# Altium PCB Panel_robottino.PcbDoc
Units mm, origin at the board's own origin, x right, y up, seen from the top; angles counter-clockwise.
Board outline 48.25 x 45.25 mm, 4 copper layers (Top Layer, Internal Plane 1, Internal Plane 2, Bottom Layer); 60 components, 0 nets, 208 pads, 5 vias.
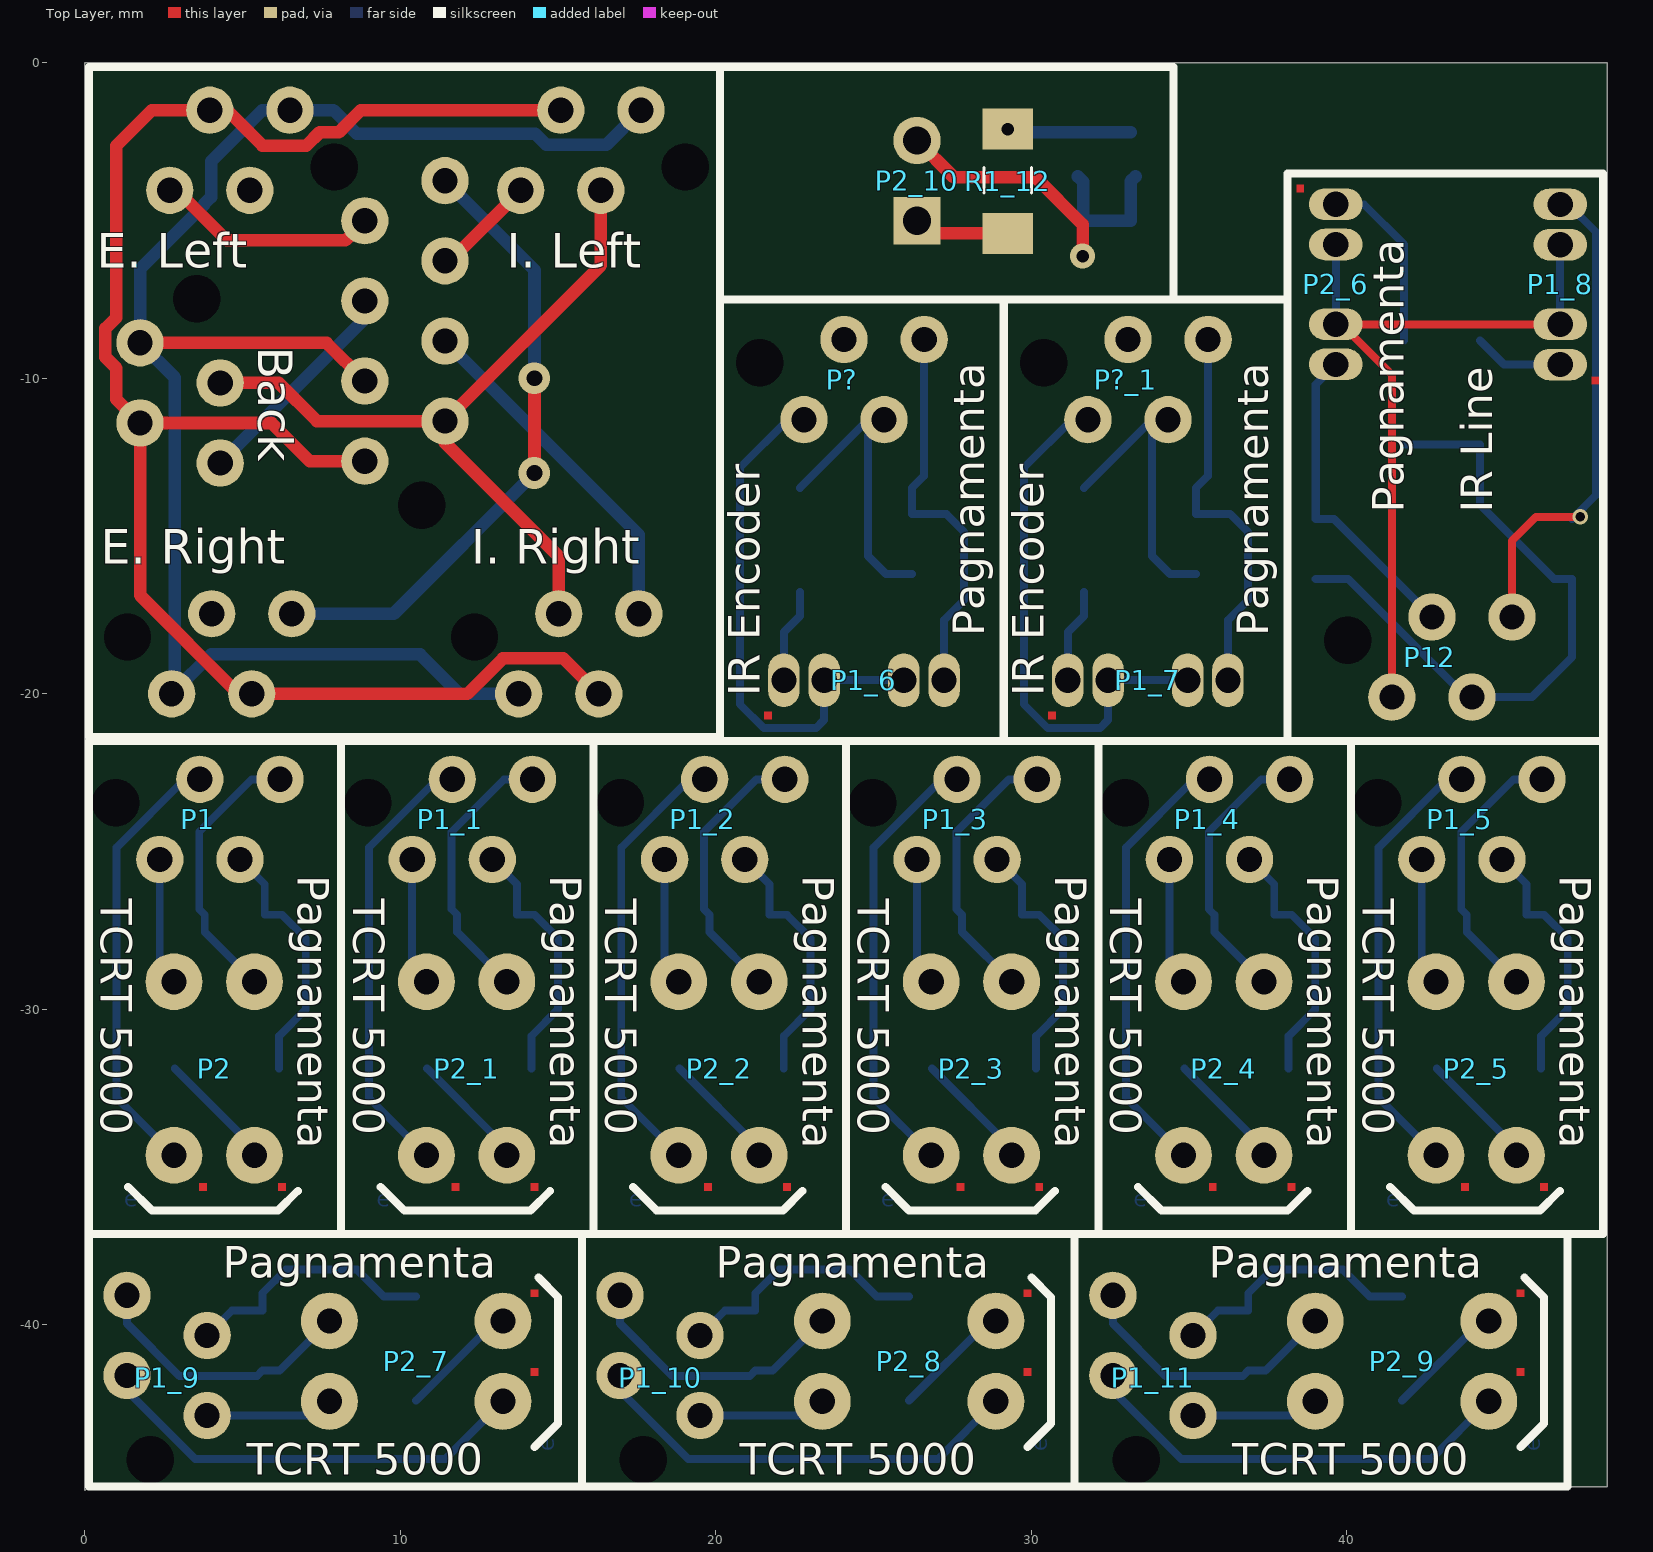
[diagram p0: Top Layer view]
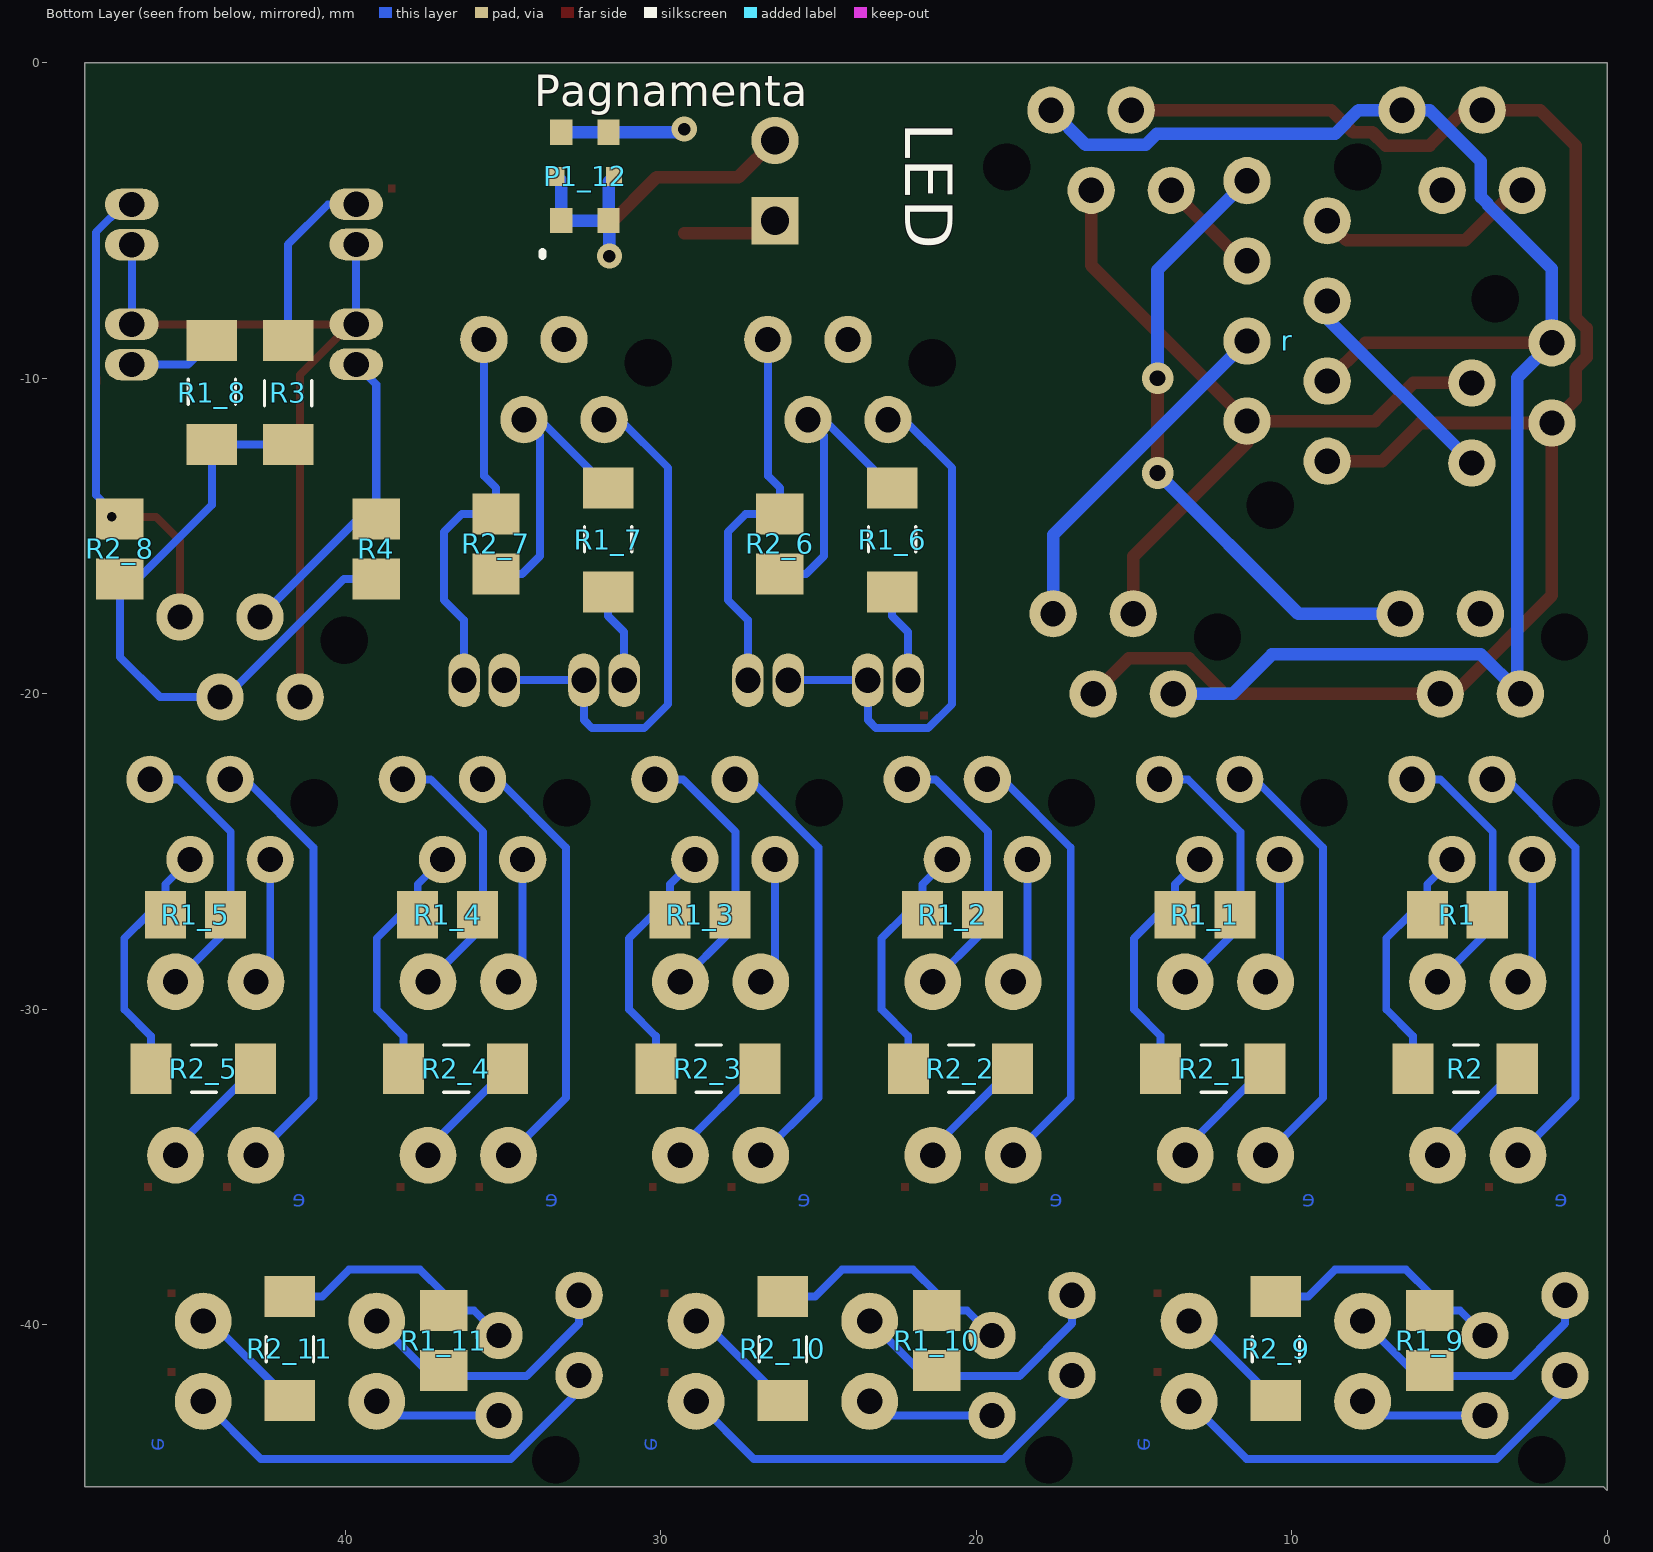
[diagram p1: Bottom Layer view, seen from below]
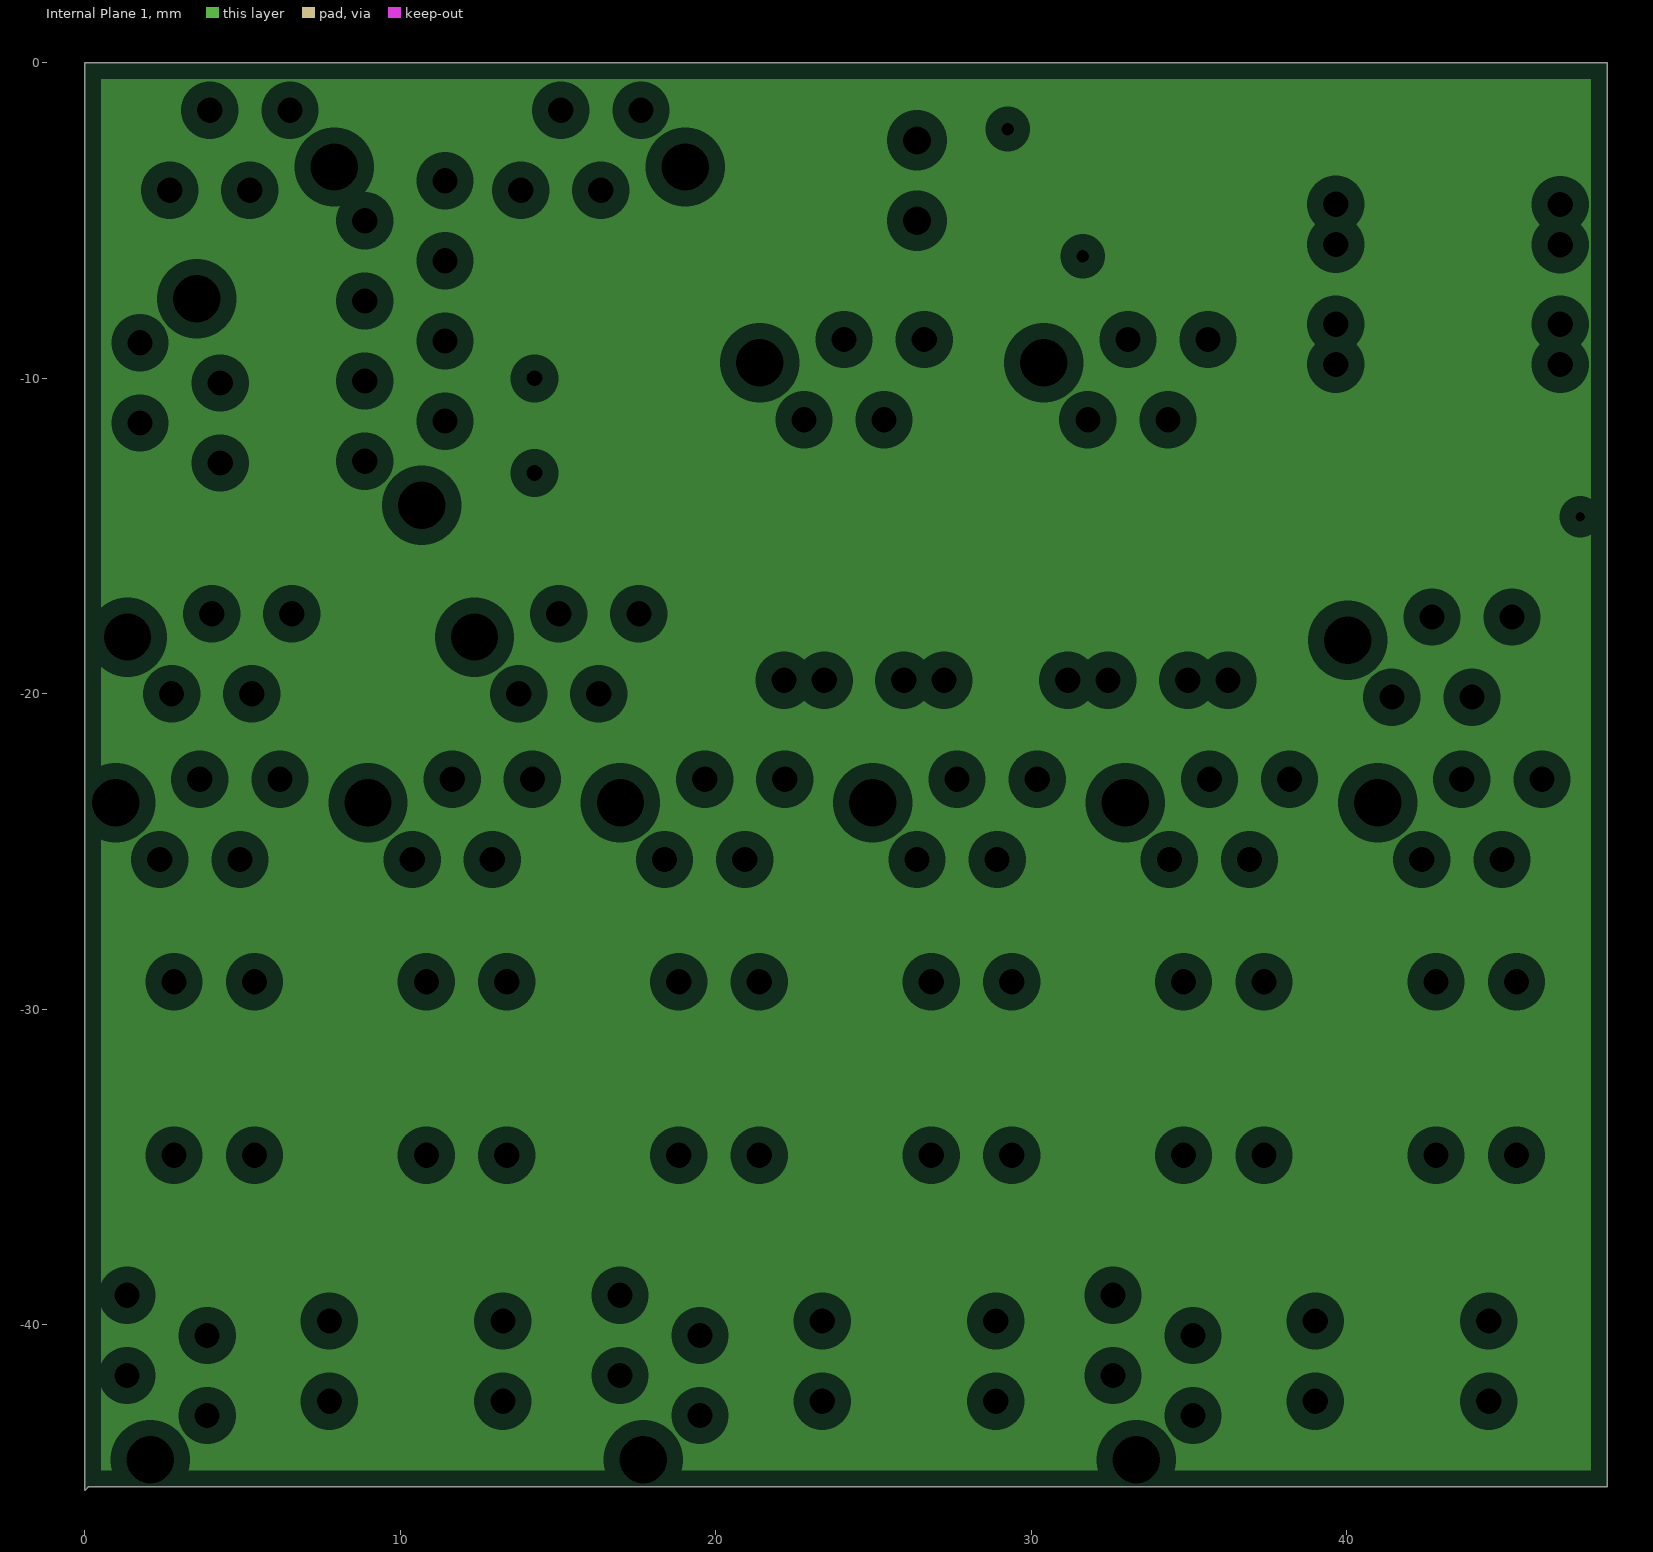
[diagram p2: Internal Plane 1, clearances drawn from the general rule]
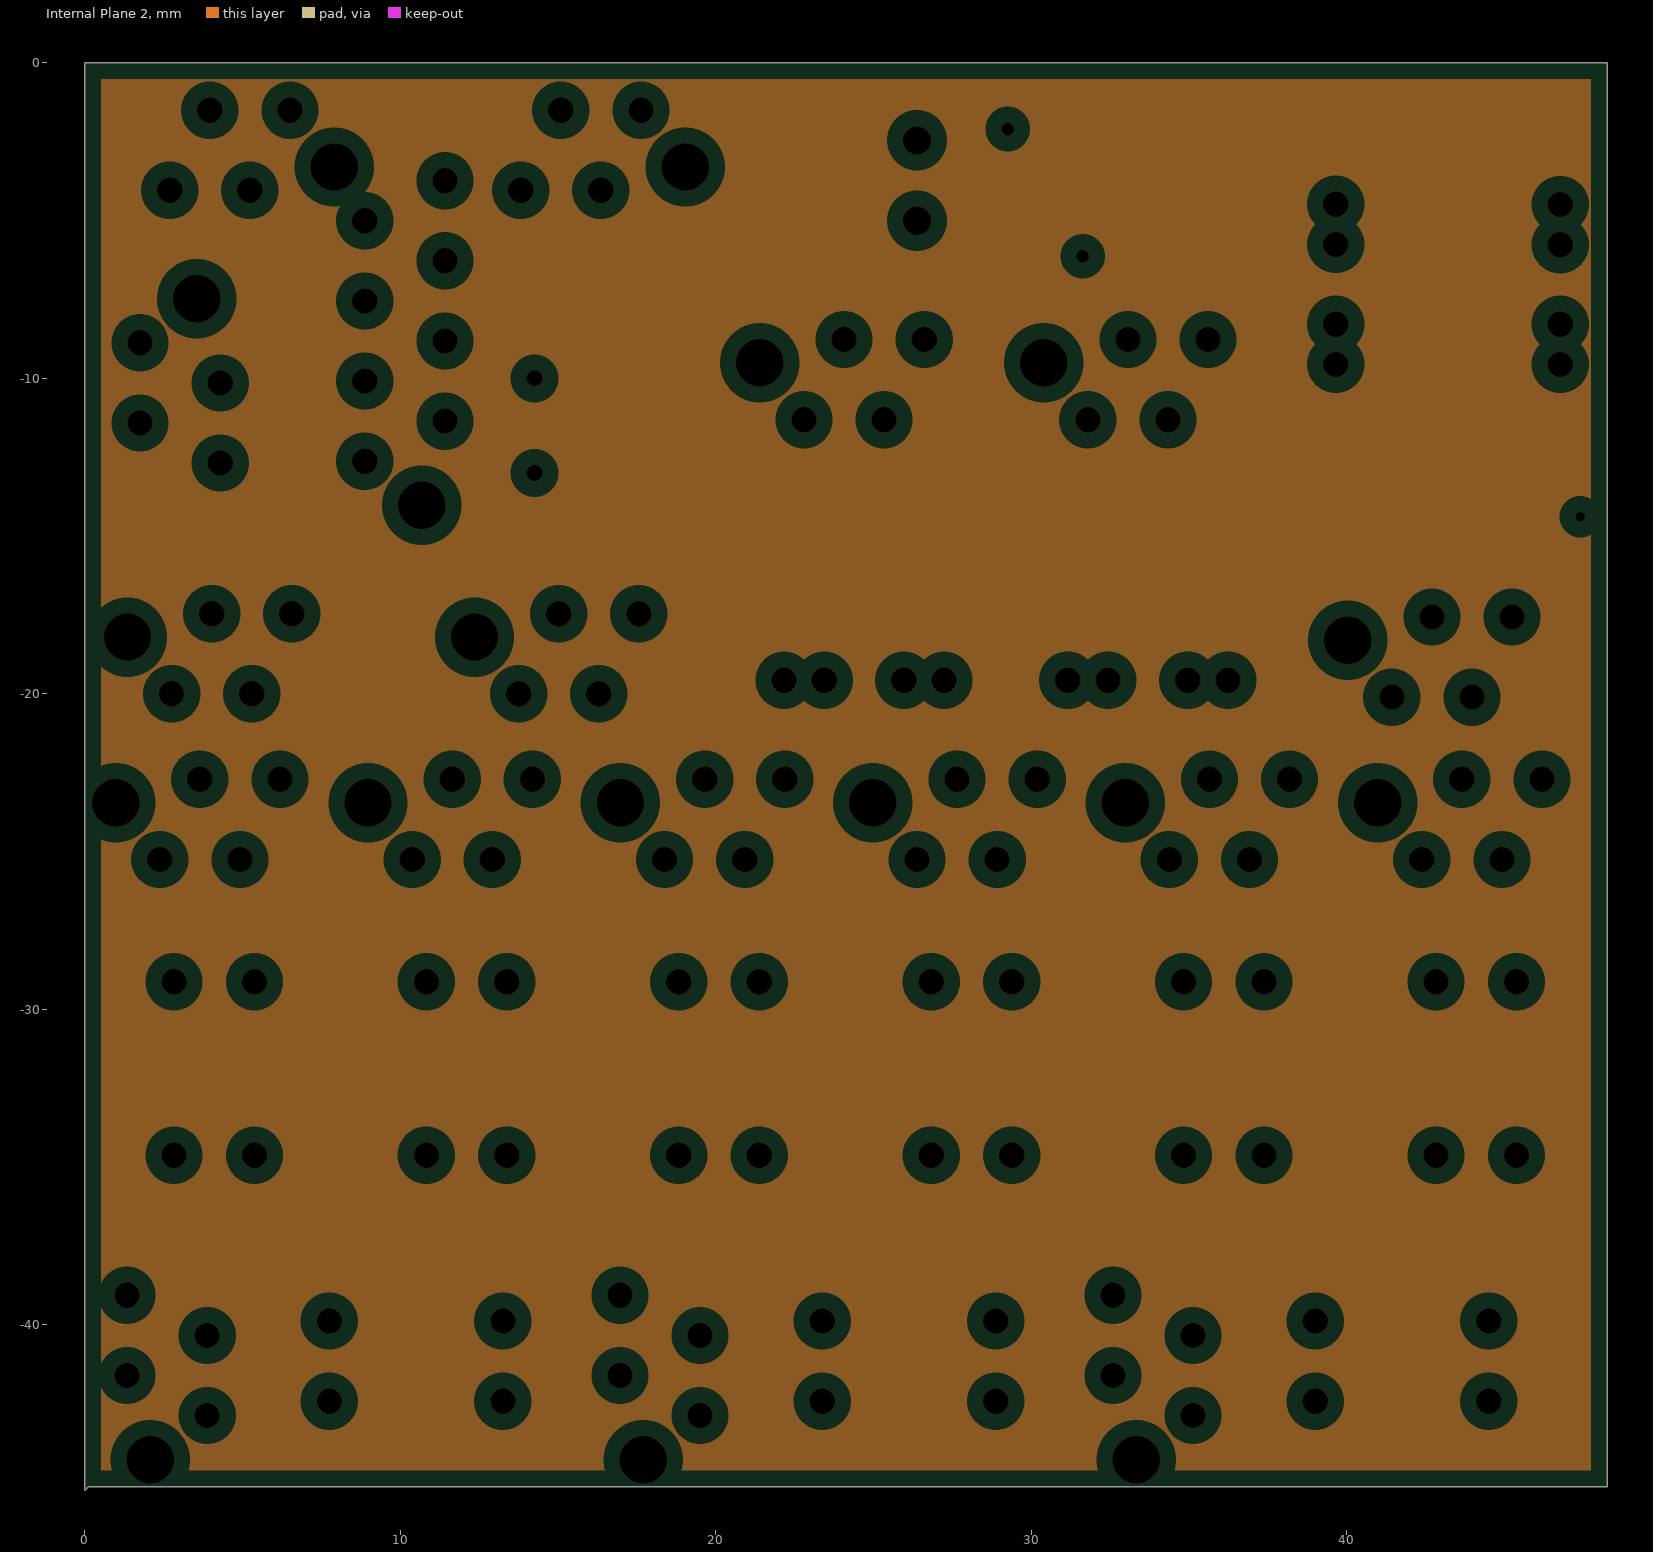
[diagram p3: Internal Plane 2, clearances drawn from the general rule]

## Layer stack, top to bottom
Top Layer: signal copper 0.0356
Dielectric: dielectric 0.32, FR-4, Dk 4.8
Internal Plane 1: plane copper 0.0356
Dielectric: dielectric 0.32, FR-4, Dk 4.8
Internal Plane 2: plane copper 0.0356
Dielectric: dielectric 0.32, FR-4, Dk 4.8
Bottom Layer: signal copper 0.0356

## Board outline
0,0 0,-45.25 0.125,-45.125 48.25,-45.125 48.25,0

## Design rules (kind name [scope] priority, off if disabled: settings)
Clearance [All] p1: gap=0.15
PlaneClearance [All] p1: clearance=0.508
PlaneConnect [All] p1: planeconnectstyle=Direct reliefexpansion=0.508 reliefentries=4 reliefconductorwidth=0.254 reliefairgap=0.254
PolygonConnect PolygonConnect_nettie [InComponent('nt1') vs InNet('GND')] p1: connectstyle=Direct reliefconductorwidth=0.254 reliefentries=4 polygonreliefangle="90 Angle"
PolygonConnect PolygonConnect_pad [InComponent('U3') vs InNet('GND')] p2: connectstyle=Direct reliefconductorwidth=0.254 reliefentries=4 polygonreliefangle="90 Angle"
PolygonConnect [All] p3: connectstyle=Relief reliefconductorwidth=0.254 reliefentries=4 polygonreliefangle="90 Angle"
RoutingVias [All] p1: holewidth=0.35 width=0.6 viastyle="Through Hole" minholewidth=0.2 minwidth=0.4 maxholewidth=1.2 maxwidth=1
SilkscreenOverComponentPads [All] p1: minsilkscreentomaskgap=0.254
SolderMaskExpansion SolderMaskExpansion_via [IsVia] p1: expansion=-0.5
SolderMaskExpansion [All] p2: expansion=0.102
Width [All] p1: maxlimit=1 minlimit=0.203 preferedwidth=0.203
25 further rules are at their usual default settings.

## Components (designator, comment, footprint, x,y, rotation, side; value= is the part's Value field where it differs from the comment)
Back "I2C" TYCO/215079-4 1.75,-8.875 r90 top (schematic designator P2)
"E. Left" "I2C" TYCO/215079-4 6.5,-1.5 r0 top (schematic designator P5)
"E. Right" "I2C" TYCO/215079-4 2.75,-20 r180 top (schematic designator P6)
"I. Left" "I2C" TYCO/215079-4 17.625,-1.5 r0 top (schematic designator P1)
"I. Right" "I2C" TYCO/215079-4 13.75,-20 r180 top (schematic designator P3)
P1 "I2C" TYCO/215079-4 2.375,-25.25 r180 top
P1_1 "I2C" TYCO/215079-4 10.375,-25.25 r180 top (schematic designator P1)
P1_2 "I2C" TYCO/215079-4 18.375,-25.25 r180 top (schematic designator P1)
P1_3 "I2C" TYCO/215079-4 26.375,-25.25 r180 top (schematic designator P1)
P1_4 "I2C" TYCO/215079-4 34.375,-25.25 r180 top (schematic designator P1)
P1_5 "I2C" TYCO/215079-4 42.375,-25.25 r180 top (schematic designator P1)
P1_6 "Header 2" "TCRT 1000" 22.157,-19.565 r0 top (schematic designator P1)
P1_7 "Header 2" "TCRT 1000" 31.157,-19.565 r0 top (schematic designator P1)
P1_8 "Header 2" "TCRT 1000" 46.761,-9.562 r90 top (schematic designator P1)
P1_9 "I2C" TYCO/215079-4 3.875,-42.875 r270 top (schematic designator P1)
P1_10 "I2C" TYCO/215079-4 19.5,-42.875 r270 top (schematic designator P1)
P1_11 "I2C" TYCO/215079-4 35.125,-42.875 r270 top (schematic designator P1)
P1_12 "Header 2" "ASMT-QWBF-NKL0E LED" 33.15,-5 r180 bottom (schematic designator P1)
P2 "Header 2" "TCRT 5000" 5.375,-29.125 r270 top
P2_1 "Header 2" "TCRT 5000" 13.375,-29.125 r270 top (schematic designator P2)
P2_2 "Header 2" "TCRT 5000" 21.375,-29.125 r270 top (schematic designator P2)
P2_3 "Header 2" "TCRT 5000" 29.375,-29.125 r270 top (schematic designator P2)
P2_4 "Header 2" "TCRT 5000" 37.375,-29.125 r270 top (schematic designator P2)
P2_5 "Header 2" "TCRT 5000" 45.375,-29.125 r270 top (schematic designator P2)
P2_6 "Header 2" "TCRT 1000" 39.649,-4.482 r270 top (schematic designator P2)
P2_7 "Header 2" "TCRT 5000" 7.75,-39.875 r0 top (schematic designator P2)
P2_8 "Header 2" "TCRT 5000" 23.375,-39.875 r0 top (schematic designator P2)
P2_9 "Header 2" "TCRT 5000" 39,-39.875 r0 top (schematic designator P2)
P2_10 "Header 2" HEADER1x2 26.375,-5 r90 top (schematic designator P2)
P12 "I2C" TYCO/215079-4 41.427,-20.103 r180 top
P? "I2C" TYCO/215079-4 22.792,-11.31 r180 top
P?_1 "I2C" TYCO/215079-4 31.792,-11.31 r180 top (schematic designator P?)
r "Header 8" TYCO/215079-8 8.875,-12.625 r270 bottom (schematic designator P4)
R1 "15kOhm" R/0805 4.75,-27 r0 bottom
R1_1 "15kOhm" R/0805 12.75,-27 r0 bottom (schematic designator R1)
R1_2 "15kOhm" R/0805 20.75,-27 r0 bottom (schematic designator R1)
R1_3 "15kOhm" R/0805 28.75,-27 r0 bottom (schematic designator R1)
R1_4 "15kOhm" R/0805 36.75,-27 r0 bottom (schematic designator R1)
R1_5 "15kOhm" R/0805 44.75,-27 r0 bottom (schematic designator R1)
R1_6 "75ohm" R/1206 22.665,-15.12 r270 bottom (schematic designator R1)
R1_7 "75ohm" R/1206 31.665,-15.12 r270 bottom (schematic designator R1)
R1_8 "75ohm" R/1206 44.221,-10.451 r270 bottom (schematic designator R1)
R1_9 "15kOhm" R/0805 5.625,-40.5 r90 bottom (schematic designator R1)
R1_10 "15kOhm" R/0805 21.25,-40.5 r90 bottom (schematic designator R1)
R1_11 "15kOhm" R/0805 36.875,-40.5 r90 bottom (schematic designator R1)
R1_12 "Rsel" R/1206 29.25,-3.75 r270 top (schematic designator R1)
R2 "75ohm" R/1206 4.5,-31.875 r0 bottom
R2_1 "75ohm" R/1206 12.5,-31.875 r0 bottom (schematic designator R2)
R2_2 "75ohm" R/1206 20.5,-31.875 r0 bottom (schematic designator R2)
R2_3 "75ohm" R/1206 28.5,-31.875 r0 bottom (schematic designator R2)
R2_4 "75ohm" R/1206 36.5,-31.875 r0 bottom (schematic designator R2)
R2_5 "75ohm" R/1206 44.5,-31.875 r0 bottom (schematic designator R2)
R2_6 "15kOhm" R/0805 26.221,-15.247 r90 bottom (schematic designator R2)
R2_7 "15kOhm" R/0805 35.221,-15.247 r90 bottom (schematic designator R2)
R2_8 "15kOhm" R/0805 47.142,-15.404 r90 bottom (schematic designator R2)
R2_9 "75ohm" R/1206 10.5,-40.75 r90 bottom (schematic designator R2)
R2_10 "75ohm" R/1206 26.125,-40.75 r90 bottom (schematic designator R2)
R2_11 "75ohm" R/1206 41.75,-40.75 r90 bottom (schematic designator R2)
R3 "75ohm" R/1206 41.808,-10.451 r90 bottom
R4 "15kOhm" R/0805 39.014,-15.404 r90 bottom

## Footprints (in the part's own frame and the unit in brackets; to place one, negate y for a bottom-side part, rotate by r counter-clockwise, add the part's x,y. Pads: shape width x height; smd on the part's side, far side on the other; paste and mask are expansions set on the pad)
"ASMT-QWBF-NKL0E LED" [mm]
  rect 0.7x0.8 smd: 1(0,0) 2(1.5,0) 4(1.5,2.8) 5(0,2.8)
  rect 0.5x0.6 smd: 3(1.675,1.4) 6(-0.15,1.4)
HEADER1x2 [mm] "2.54mm Header"
  rect 1.5x1.5 hole 0.9: 1(0,0)
  round 1.5 hole 0.9: 2(2.54,0)
  body extent -1.27,-1.27 3.81,1.27, height 8.44
R/0805 [mm] "Chip Resistor; Body 2.0 x 1.3 mm (LxW typ)"
  rect 1.3x1.5 smd: 1(-0.95,0) 2(0.95,0)
  body extent -1,-0.62 1,0.63, height 0.78
R/1206 [mm] "Chip Resistor, Body 3.2x1.6mm, IPC Low Density"
  rect 1.3x1.6 smd: 1(-1.651,0) 2(1.651,0)
  silkscreen extent -0.43,-0.75 0.38,0.75, body extent -1.6,-0.8 1.6,0.8, height 1
"TCRT 1000" [mm]
  oval 1x1.7 hole 0.8: 1(0,0) 2(1.275,0) 3(3.8,0) 4(5.075,0)
  Top Layer region: -0.625,-1.25 -0.375,-1.25 -0.375,-1 -0.625,-1
"TCRT 5000" [mm]
  round 1.8 hole 0.8: 1(5.5,0) 2(0,0) 3(0,-2.55) 4(5.5,-2.55)
  Top Layer region: 6.375,-1.75 6.625,-1.75 6.625,-1.5 6.375,-1.5
  Top Layer region: 6.375,0.75 6.625,0.75 6.625,1 6.375,1
TYCO/215079-4 [mm]
  round 1.5 hole 0.8: 1(0,0) 2(-1.27,-2.54) 3(-2.54,0) 4(-3.81,-2.54)
  round 1.3 hole 1.5 unplated: 5(1.4,-1.8)
  body extent -5.41,-3.74 1.6,1.26, height 4
TYCO/215079-8 [mm]
  round 1.3 hole 1.5 unplated: 0(1.4,-1.8)
  round 1.5 hole 0.8: 1(0,0) 2(-1.27,-2.54) 3(-2.54,0) 4(-3.81,-2.54) 5(-5.08,0) 6(-6.35,-2.54) 7(-7.62,0) 8(-8.89,-2.54)
  body extent -10.49,-3.77 1.6,1.23, height 4

## Part data
Back "E. Left" "E. Right" "I. Left" "I. Right" P1 P1_1 P1_2 P1_3 P1_4 P1_5 P1_9 P1_10 P1_11 P12 P? P?_1: library part Micromatch-I2C, "Micromatch I2C Connector"
P1_6 P1_7 P1_8 P2_6: library part "TCRT 1000", "Header, 2-Pin"
P1_12: library part PowerLed, "Header, 2-Pin"
P2 P2_1 P2_2 P2_3 P2_4 P2_5 P2_7 P2_8 P2_9: library part "TCRT 5000", "Header, 2-Pin"
P2_10: "Header, 2-Pin"
r: "Header, 8-Pin"
R1 R1_1 R1_2 R1_3 R1_4 R1_5 R1_6 R1_7 R1_8 R1_9 R1_10 R1_11 R1_12 R2 R2_1 R2_2 R2_3 R2_4 R2_5 R2_6 R2_7 R2_8 R2_9 R2_10 R2_11 R3 R4: library part R, "Resistor"

## Via types
v1: diameter 0.8, hole 0.4, Top Layer to Bottom Layer, 2 vias
v2: diameter 1, hole 0.5, Top Layer to Bottom Layer, 2 vias
v3: diameter 0.5, hole 0.3, Top Layer to Bottom Layer, 1 vias

## Nets (pads, with @x,y where several pads share a name; then routed paths per layer and width w, separated by ;. In a path a pad name is that pad's centre, name@x,y a point inside that pad or via, vN(x,y) a via of type N, cw(c..) or ccw(c..) an arc to the next point about the centre after c; other vN are vias at no path point)
pads on no net: "E. Left.1" "E. Left.2" "E. Left.3" "E. Left.4" "E. Left.5" "E. Right.1" "E. Right.2" "E. Right.3" "E. Right.4" "E. Right.5" "I. Left.1" "I. Left.2" "I. Left.3" "I. Left.4" "I. Left.5" "I. Right.1" "I. Right.2" "I. Right.3" "I. Right.4" "I. Right.5" Back.1 Back.2 Back.3 Back.4 Back.5 P1.1 P1.2 P1.3 P1.4 P1.5 P1_1.1 P1_1.2 P1_1.3 P1_1.4 P1_1.5 P1_2.1 P1_2.2 P1_2.3 P1_2.4 P1_2.5 P1_3.1 P1_3.2 P1_3.3 P1_3.4 P1_3.5 P1_4.1 P1_4.2 P1_4.3 P1_4.4 P1_4.5 P1_5.1 P1_5.2 P1_5.3 P1_5.4 P1_5.5 P1_6.1 P1_6.2 P1_6.3 P1_6.4 P1_7.1 P1_7.2 P1_7.3 P1_7.4 P1_8.1 P1_8.2 P1_8.3 P1_8.4 P1_9.1 P1_9.2 P1_9.3 P1_9.4 P1_9.5 P1_10.1 P1_10.2 P1_10.3 P1_10.4 P1_10.5 P1_11.1 P1_11.2 P1_11.3 P1_11.4 P1_11.5 P1_12.1 P1_12.2 P1_12.3 P1_12.4 P1_12.5 P1_12.6 P2.1 P2.2 P2.3 P2.4 P2_1.1 P2_1.2 P2_1.3 P2_1.4 P2_2.1 P2_2.2 P2_2.3 P2_2.4 P2_3.1 P2_3.2 P2_3.3 P2_3.4 P2_4.1 P2_4.2 P2_4.3 P2_4.4 P2_5.1 P2_5.2 P2_5.3 P2_5.4 P2_6.1 P2_6.2 P2_6.3 P2_6.4 P2_7.1 P2_7.2 P2_7.3 P2_7.4 P2_8.1 P2_8.2 P2_8.3 P2_8.4 P2_9.1 P2_9.2 P2_9.3 P2_9.4 P2_10.1 P2_10.2 P12.1 P12.2 P12.3 P12.4 P12.5 P?.1 P?.2 P?.3 P?.4 P?.5 P?_1.1 P?_1.2 P?_1.3 P?_1.4 P?_1.5 R1.1 R1.2 R1_1.1 R1_1.2 R1_2.1 R1_2.2 R1_3.1 R1_3.2 R1_4.1 R1_4.2 R1_5.1 R1_5.2 R1_6.1 R1_6.2 R1_7.1 R1_7.2 R1_8.1 R1_8.2 R1_9.1 R1_9.2 R1_10.1 R1_10.2 R1_11.1 R1_11.2 R1_12.1 R1_12.2 R2.1 R2.2 R2_1.1 R2_1.2 R2_2.1 R2_2.2 R2_3.1 R2_3.2 R2_4.1 R2_4.2 R2_5.1 R2_5.2 R2_6.1 R2_6.2 R2_7.1 R2_7.2 R2_8.1 R2_8.2 R2_9.1 R2_9.2 R2_10.1 R2_10.2 R2_11.1 R2_11.2 R3.1 R3.2 R4.1 R4.2 r.0 r.1 r.2 r.3 r.4 r.5 r.6 r.7 r.8
copper on no net: | length 720
  Top Layer w0.254: 39.649,-8.282 39.823,-8.282 39.828,-8.287 ; 41.427,-20.103 41.427,-9.886 39.828,-8.287 ; 45.237,-17.563 45.237,-15.15 45.999,-14.388 v3(47.396,-14.388) ; 46.761,-8.287 39.828,-8.287
  Top Layer w0.4: 1.75,-8.875 7.665,-8.875 8.875,-10.085 ; 2.69,-4.04 2.915,-4.04 4.5,-5.625 8.255,-5.625 8.875,-5.005 ; 4.29,-10.145 6.145,-10.145 7.355,-11.355 11.415,-11.355 ; 8.875,-12.625 7.125,-12.625 5.915,-11.415 1.75,-11.415 ; 11.415,-6.275 11.58,-6.275 13.815,-4.04 ; v2(14.25,-13) v2(14.25,-10) ; 15.02,-17.46 15.02,-15.645 11.415,-12.04 11.415,-11.355 ; 15.085,-1.5 8.75,-1.5 8.05,-2.2 7.444,-2.2 7.019,-2.625 5.625,-2.625 4.5,-1.5 3.96,-1.5 2.125,-1.5 1,-2.625 1,-8.069 0.65,-8.419 0.65,-9.331 1,-9.681 1,-10.665 1.75,-11.415 ; 16.29,-20 15.165,-18.875 13.25,-18.875 12.125,-20 5.29,-20 4.875,-20 1.75,-16.875 1.75,-11.415 ; 16.355,-4.04 16.355,-6.415 11.415,-11.355 ; 17.625,-1.75 17.625,-1.5 ; 26.375,-5 26.776,-5.401 29.25,-5.401 ; 26.375,-2.46 27.54,-3.625 30.125,-3.625 31.625,-5.125 v1(31.625,-6.125) ; v1(29.25,-2.099) v1@29.401,-2.25
  Bottom Layer w0.25: 1.335,-41.605 1.335,-42.085 3.5,-44.25 11.425,-44.25 13.25,-42.425 ; 1.335,-39.065 1.335,-39.96 3,-41.625 5.45,-41.625 5.625,-41.45 6.175,-41.45 7.75,-39.875 ; 2.375,-25.25 2.375,-28.675 2.825,-29.125 ; 2.825,-34.625 1,-32.8 1,-24.875 3.165,-22.71 3.645,-22.71 ; 2.849,-31.875 5.375,-34.401 5.375,-34.625 ; 3.875,-42.875 7.3,-42.875 7.75,-42.425 ; 3.875,-39.75 3.875,-40.335 4.66,-39.55 5.625,-39.55 5.625,-39 6.375,-38.25 8.625,-38.25 9.474,-39.099 10.5,-39.099 ; 5.375,-29.125 3.8,-27.55 3.8,-27 3.625,-26.825 3.625,-24.375 5.29,-22.71 6.185,-22.71 ; 5.5,-25.25 4.915,-25.25 5.7,-26.035 5.7,-27 6.25,-27 7,-27.75 7,-30 6.151,-30.849 6.151,-31.875 ; 10.375,-25.25 10.375,-28.675 10.825,-29.125 ; 10.5,-42.401 13.026,-39.875 13.25,-39.875 ; 10.825,-34.625 9,-32.8 9,-24.875 11.165,-22.71 11.645,-22.71 ; 10.849,-31.875 13.375,-34.401 13.375,-34.625 ; 13.375,-29.125 11.8,-27.55 11.8,-27 11.625,-26.825 11.625,-24.375 13.29,-22.71 14.185,-22.71 ; 13.5,-25.25 12.915,-25.25 13.7,-26.035 13.7,-27 14.25,-27 15,-27.75 15,-30 14.151,-30.849 14.151,-31.875 ; 16.96,-41.605 16.96,-42.085 19.125,-44.25 27.05,-44.25 28.875,-42.425 ; 16.96,-39.065 16.96,-39.96 18.625,-41.625 21.075,-41.625 21.25,-41.45 21.8,-41.45 23.375,-39.875 ; 18.375,-25.25 18.375,-28.675 18.825,-29.125 ; 18.825,-34.625 17,-32.8 17,-24.875 19.165,-22.71 19.645,-22.71 ; 18.849,-31.875 21.375,-34.401 21.375,-34.625 ; 19.5,-42.875 22.925,-42.875 23.375,-42.425 ; 19.5,-39.75 19.5,-40.335 20.285,-39.55 21.25,-39.55 21.25,-39 22,-38.25 24.25,-38.25 25.099,-39.099 26.125,-39.099 ; 21.375,-29.125 19.8,-27.55 19.8,-27 19.625,-26.825 19.625,-24.375 21.29,-22.71 22.185,-22.71 ; 21.5,-25.25 20.915,-25.25 21.7,-26.035 21.7,-27 22.25,-27 23,-27.75 23,-30 22.151,-30.849 22.151,-31.875 ; 26.125,-42.401 28.651,-39.875 28.875,-39.875 ; 26.375,-25.25 26.375,-28.675 26.825,-29.125 ; 26.825,-34.625 25,-32.8 25,-24.875 27.165,-22.71 27.645,-22.71 ; 26.849,-31.875 29.375,-34.401 29.375,-34.625 ; 29.375,-29.125 27.8,-27.55 27.8,-27 27.625,-26.825 27.625,-24.375 29.29,-22.71 30.185,-22.71 ; 29.5,-25.25 28.915,-25.25 29.7,-26.035 29.7,-27 30.25,-27 31,-27.75 31,-30 30.151,-30.849 30.151,-31.875 ; 32.585,-41.605 32.585,-42.085 34.75,-44.25 42.675,-44.25 44.5,-42.425 ; 32.585,-39.065 32.585,-39.96 34.25,-41.625 36.7,-41.625 36.875,-41.45 37.425,-41.45 39,-39.875 ; 34.375,-25.25 34.375,-28.675 34.825,-29.125 ; 34.825,-34.625 33,-32.8 33,-24.875 35.165,-22.71 35.645,-22.71 ; 34.849,-31.875 37.375,-34.401 37.375,-34.625 ; 35.125,-42.875 38.55,-42.875 39,-42.425 ; 35.125,-39.75 35.125,-40.335 35.91,-39.55 36.875,-39.55 36.875,-39 37.625,-38.25 39.875,-38.25 40.724,-39.099 41.75,-39.099 ; 37.375,-29.125 35.8,-27.55 35.8,-27 35.625,-26.825 35.625,-24.375 37.29,-22.71 38.185,-22.71 ; 37.5,-25.25 36.915,-25.25 37.7,-26.035 37.7,-27 38.25,-27 39,-27.75 39,-30 38.151,-30.849 38.151,-31.875 ; 41.75,-42.401 44.276,-39.875 44.5,-39.875 ; 42.375,-25.25 42.375,-28.675 42.825,-29.125 ; 42.825,-34.625 41,-32.8 41,-24.875 43.165,-22.71 43.645,-22.71 ; 42.849,-31.875 45.375,-34.401 45.375,-34.625 ; 45.375,-29.125 43.8,-27.55 43.8,-27 43.625,-26.825 43.625,-24.375 45.29,-22.71 46.185,-22.71 ; 45.5,-25.25 44.915,-25.25 45.7,-26.035 45.7,-27 46.25,-27 47,-27.75 47,-30 46.151,-30.849 46.151,-31.875
  Bottom Layer w0.254: 22.157,-19.565 22.157,-18.041 22.665,-17.533 22.665,-16.771 ; 22.665,-13.469 24.697,-11.437 25.205,-11.437 ; 22.792,-11.31 22.284,-11.31 20.76,-12.834 20.76,-20.327 21.522,-21.089 23.173,-21.089 23.432,-20.83 23.432,-19.565 25.957,-19.565 ; 25.332,-11.31 25.205,-11.437 ; 26.221,-16.197 25.393,-16.197 24.824,-15.628 24.824,-11.818 25.205,-11.437 ; 26.602,-8.77 26.602,-13.088 26.221,-13.469 26.221,-14.297 27.303,-14.297 27.872,-14.866 27.872,-17.025 27.232,-17.665 27.232,-19.565 ; 31.157,-19.565 31.157,-18.041 31.665,-17.533 31.665,-16.771 ; 31.665,-13.469 33.697,-11.437 34.205,-11.437 ; 31.792,-11.31 31.284,-11.31 29.76,-12.834 29.76,-20.327 30.522,-21.089 32.173,-21.089 32.432,-20.83 32.432,-19.565 34.957,-19.565 ; 34.332,-11.31 34.205,-11.437 ; 35.221,-16.197 34.393,-16.197 33.824,-15.628 33.824,-11.818 34.205,-11.437 ; 35.602,-8.77 35.602,-13.088 35.221,-13.469 35.221,-14.297 36.303,-14.297 36.872,-14.866 36.872,-17.025 36.232,-17.665 36.232,-19.565 ; 39.014,-16.354 40.036,-16.354 43.785,-20.103 43.967,-20.103 45.872,-20.103 47.142,-18.833 47.142,-16.354 46.568,-16.354 44.221,-14.007 44.221,-12.102 41.808,-12.102 ; 39.649,-9.557 39.014,-10.192 39.014,-14.454 39.588,-14.454 42.697,-17.563 ; 39.649,-8.282 39.649,-5.757 ; 39.649,-4.482 40.538,-4.482 41.808,-5.752 41.808,-8.8 ; 44.221,-8.8 44.983,-9.562 46.761,-9.562 ; 46.761,-8.287 46.761,-5.762 ; 46.761,-4.487 47.02,-4.487 47.904,-5.371 47.904,-13.692 47.142,-14.454
  Bottom Layer w0.4: 2.75,-20 2.85,-19.9 ; 4.29,-12.685 8.875,-8.1 8.875,-7.545 ; 6.56,-17.46 9.79,-17.46 v2(14.25,-13) ; 11.415,-8.815 17.56,-14.96 17.56,-17.46 ; 11.415,-3.735 14.25,-6.57 v2(14.25,-10) ; 13.75,-20 11.875,-20 10.625,-18.75 4,-18.75 2.85,-19.9 ; 17.625,-1.5 16.525,-2.6 14.629,-2.6 14.279,-2.25 8.625,-2.25 7.875,-1.5 6.5,-1.5 5.625,-1.5 4,-3.125 4,-4.25 3.79,-4.46 3.79,-4.496 1.75,-6.536 1.75,-8.875 2.85,-9.975 2.85,-19.9 ; v1(29.25,-2.099) 29.351,-2.2 31.65,-2.2 33.15,-2.2 ; 31.475,-3.6 31.65,-3.775 31.65,-5 ; v1(31.625,-6.125) 31.625,-5.025 31.65,-5 ; 33.3,-3.6 33.15,-3.75 33.15,-5 31.65,-5

## Polygon pours and split planes (outlines as drawn)
no net on Internal Plane 1 (split plane): 47.74,-44.615 0.51,-44.615 0.51,-0.51 47.74,-0.51
no net on Internal Plane 2 (split plane): 47.74,-44.615 0.51,-44.615 0.51,-0.51 47.74,-0.51

## Other copper
Bottom Layer:
  text "e" at 1.25,-36.25 h0.5
  text "e" at 9.25,-36.25 h0.5
  text "e" at 17.25,-36.25 h0.5
  text "e" at 25.25,-36.25 h0.5
  text "e" at 33.25,-36.25 h0.5
  text "e" at 41.25,-36.25 h0.5
  text "e" at 14.875,-44 h0.5 r90
  text "e" at 30.5,-44 h0.5 r90
  text "e" at 46.125,-44 h0.5 r90

## Silkscreen, mask and mechanical layers (free items; w line width, h text height)
Top Overlay:
  lines w0.254: 1.375,-35.625 2.125,-36.375 ; 6.75,-35.75 6.125,-36.375 2.125,-36.375 ; 9.375,-35.625 10.125,-36.375 ; 14.25,-43.875 15,-43.125 ; 14.375,-38.5 15,-39.125 15,-43.125 ; 14.75,-35.75 14.125,-36.375 10.125,-36.375 ; 17.375,-35.625 18.125,-36.375 ; 22.75,-35.75 22.125,-36.375 18.125,-36.375 ; 25.375,-35.625 26.125,-36.375 ; 29.875,-43.875 30.625,-43.125 ; 30,-38.5 30.625,-39.125 30.625,-43.125 ; 30.75,-35.75 30.125,-36.375 26.125,-36.375 ; 33.375,-35.625 34.125,-36.375 ; 38.75,-35.75 38.125,-36.375 34.125,-36.375 ; 41.375,-35.625 42.125,-36.375 ; 45.5,-43.875 46.25,-43.125 ; 45.625,-38.5 46.25,-39.125 46.25,-43.125 ; 46.75,-35.75 46.125,-36.375 42.125,-36.375 ; 0.125,-37.125 0.125,-21.5 8.125,-21.5 ; 0.125,-37.125 8.125,-37.125 ; 0.125,-37.125 15.75,-37.125 ; 0.125,-37.125 0.125,-45.125 15.75,-45.125 ; 2.125,-36.375 2.125,-36.375 ; 8.125,-37.125 8.125,-21.5 ; 8.125,-37.125 8.125,-21.5 ; 8.125,-37.125 16.125,-37.125 ; 8.125,-21.5 16.125,-21.5 ; 10.125,-36.375 10.125,-36.375 ; 15,-43.125 15,-43.125 ; 15.75,-45.125 15.75,-37.125 ; 15.75,-45.125 31.375,-45.125 ; 15.75,-45.125 15.75,-37.125 ; 15.75,-37.125 31.375,-37.125 ; 16.125,-37.125 16.125,-21.5 ; 16.125,-37.125 16.125,-21.5 ; 16.125,-37.125 24.125,-37.125 ; 16.125,-21.5 24.125,-21.5 ; 18.125,-36.375 18.125,-36.375 ; 20.125,-7.5 20.125,-0.125 ; 20.125,-7.5 34.5,-7.5 34.5,-0.125 20.125,-0.125 ; 20.125,-7.5 20.125,-21.5 29.125,-21.5 ; 20.125,-7.5 29.125,-7.5 ; 20.125,-0.125 0.125,-0.125 0.125,-21.375 20.125,-21.375 20.125,-0.125 ; 24.125,-37.125 24.125,-21.5 ; 24.125,-37.125 24.125,-21.5 ; 24.125,-37.125 32.125,-37.125 ; 24.125,-21.5 32.125,-21.5 ; 26.125,-36.375 26.125,-36.375 ; 29.125,-21.5 29.125,-7.5 ; 29.125,-21.5 29.125,-7.5 ; 29.125,-21.5 38.125,-21.5 ; 29.125,-7.5 38.125,-7.5 38.125,-21.5 ; 30.625,-43.125 30.625,-43.125 ; 31.375,-45.125 31.375,-37.125 ; 31.375,-45.125 47,-45.125 47,-37.125 31.375,-37.125 ; 31.375,-45.125 31.375,-37.125 ; 32.125,-37.125 32.125,-21.5 ; 32.125,-37.125 32.125,-21.5 ; 32.125,-37.125 40.125,-37.125 ; 32.125,-21.5 40.125,-21.5 ; 34.125,-36.375 34.125,-36.375 ; 38.125,-21.5 48.125,-21.5 ; 38.125,-21.5 38.125,-3.5 48.125,-3.5 48.125,-21.5 ; 40.125,-37.125 40.125,-21.5 ; 40.125,-37.125 40.125,-21.5 ; 40.125,-37.125 48.125,-37.125 48.125,-21.5 ; 40.125,-21.5 48.125,-21.5 ; 42.125,-36.375 42.125,-36.375 ; 46.25,-43.125 46.25,-43.125
  text "Pagnamenta" at 41.808,-14.261 h1 r90
  text "IR Line" at 44.602,-14.261 h1 r90
  text "Pagnamenta" at 28.507,-18.168 h1 r90
  text "Pagnamenta" at 37.507,-18.168 h1 r90
  text "IR Encoder" at 21.395,-20.073 h1 r90
  text "IR Encoder" at 30.395,-20.073 h1 r90
  text "Pagnamenta" at 6.75,-25.75 h1 r270
  text "Pagnamenta" at 14.75,-25.75 h1 r270
  text "Pagnamenta" at 22.75,-25.75 h1 r270
  text "Pagnamenta" at 30.75,-25.75 h1 r270
  text "Pagnamenta" at 38.75,-25.75 h1 r270
  text "Pagnamenta" at 46.75,-25.75 h1 r270
  text "TCRT 5000" at 0.5,-26.5 h1 r270
  text "TCRT 5000" at 8.5,-26.5 h1 r270
  text "TCRT 5000" at 16.5,-26.5 h1 r270
  text "TCRT 5000" at 24.5,-26.5 h1 r270
  text "TCRT 5000" at 32.5,-26.5 h1 r270
  text "TCRT 5000" at 40.5,-26.5 h1 r270
  text "Pagnamenta" at 4.375,-38.5 h1
  text "Pagnamenta" at 20,-38.5 h1
  text "Pagnamenta" at 35.625,-38.5 h1
  text "TCRT 5000" at 5.125,-44.75 h1
  text "TCRT 5000" at 20.75,-44.75 h1
  text "TCRT 5000" at 36.375,-44.75 h1
Bottom Overlay:
  lines w0.254: 33.75,-6.125 33.75,-6
  text "Pagnamenta" at 34,-1.375 h1
  text "LED" at 22.25,-1.875 h1.5 r90
Mechanical 1:
  the board outline again, w0.254
Mechanical 16:
  drawing of 1874 lines, arcs and shapes, not listed
  text "1" at -11.754,92.861 h1.78
  text "2" at 60.89,92.861 h1.78
  text "3" at 134.042,92.861 h1.78
  text "4" at 206.94,92.861 h1.78
  text "A" at -46.095,69.849 h1.78
  text "A" at 240.925,69.849 h1.78
  text "B" at -46.095,21.792 h1.78
  text "B" at 240.925,21.792 h1.78
  text "C" at -46.095,-26.722 h1.78
  text "C" at 240.925,-26.722 h1.78
  text "ENGINEER:" at 125.99,-63.73 h1.14
  text "TITLE:" at 164.09,-63.73 h1.14
  text "PCB DESIGNER:" at 125.99,-71.223 h1.14
  text "D" at -46.095,-74.728 h1.78
  text "D" at 240.925,-74.728 h1.78
  text "DATE:" at 125.99,-78.97 h1.14
  text "PART NO.:" at 164.09,-78.97 h1.14
  text "REV:" at 217.43,-78.97 h1.14
  text "Altium Limited" at 92.97,-81.51 h1.78
  text ".PRINT_DATE" at 127.26,-82.018 h1.78
  text "12a Rodborough Rd" at 92.97,-84.05 h1.78
  text "Frenchs Forest" at 92.97,-86.59 h1.78
  text "FILE NAME:" at 125.99,-86.59 h1.14
  text "DWG NO:" at 164.09,-86.59 h1.14
  text "SCALE:" at 217.43,-86.59 h1.14
  text "NSW 2086" at 92.97,-89.13 h1.78
  text ".PCB_FILE_NAME_NO_PATH" at 127.26,-89.638 h1.78
  text "1" at -11.754,-95.099 h1.78
  text "2" at 60.89,-95.099 h1.78
  text "3" at 134.042,-95.099 h1.78
  text "4" at 206.94,-95.099 h1.78